# Altium PCB PCB1_SMD.PcbDoc
Units mm, origin at the board's own origin, x right, y up, seen from the top; angles counter-clockwise.
Board outline 82.88 x 49.4 mm, 4 copper layers (Top Layer, Internal Plane 1, Internal Plane 2, Bottom Layer); 45 components, 35 nets, 171 pads, 0 vias.
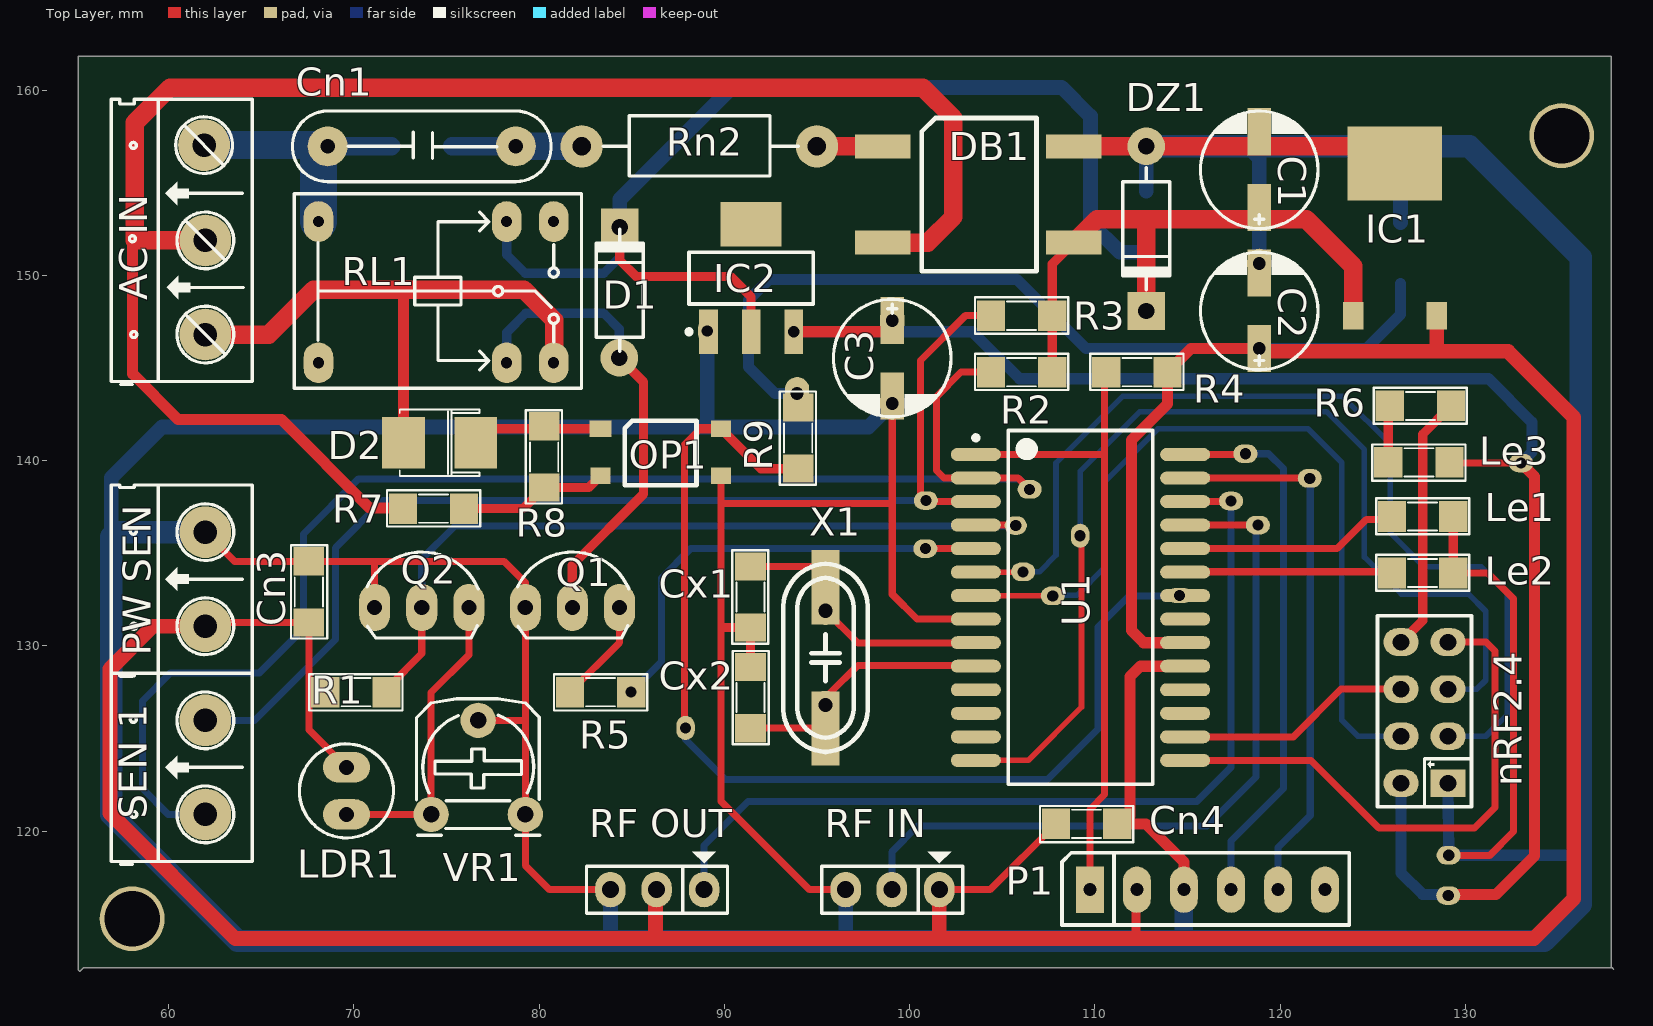
[diagram p0: Top Layer view]
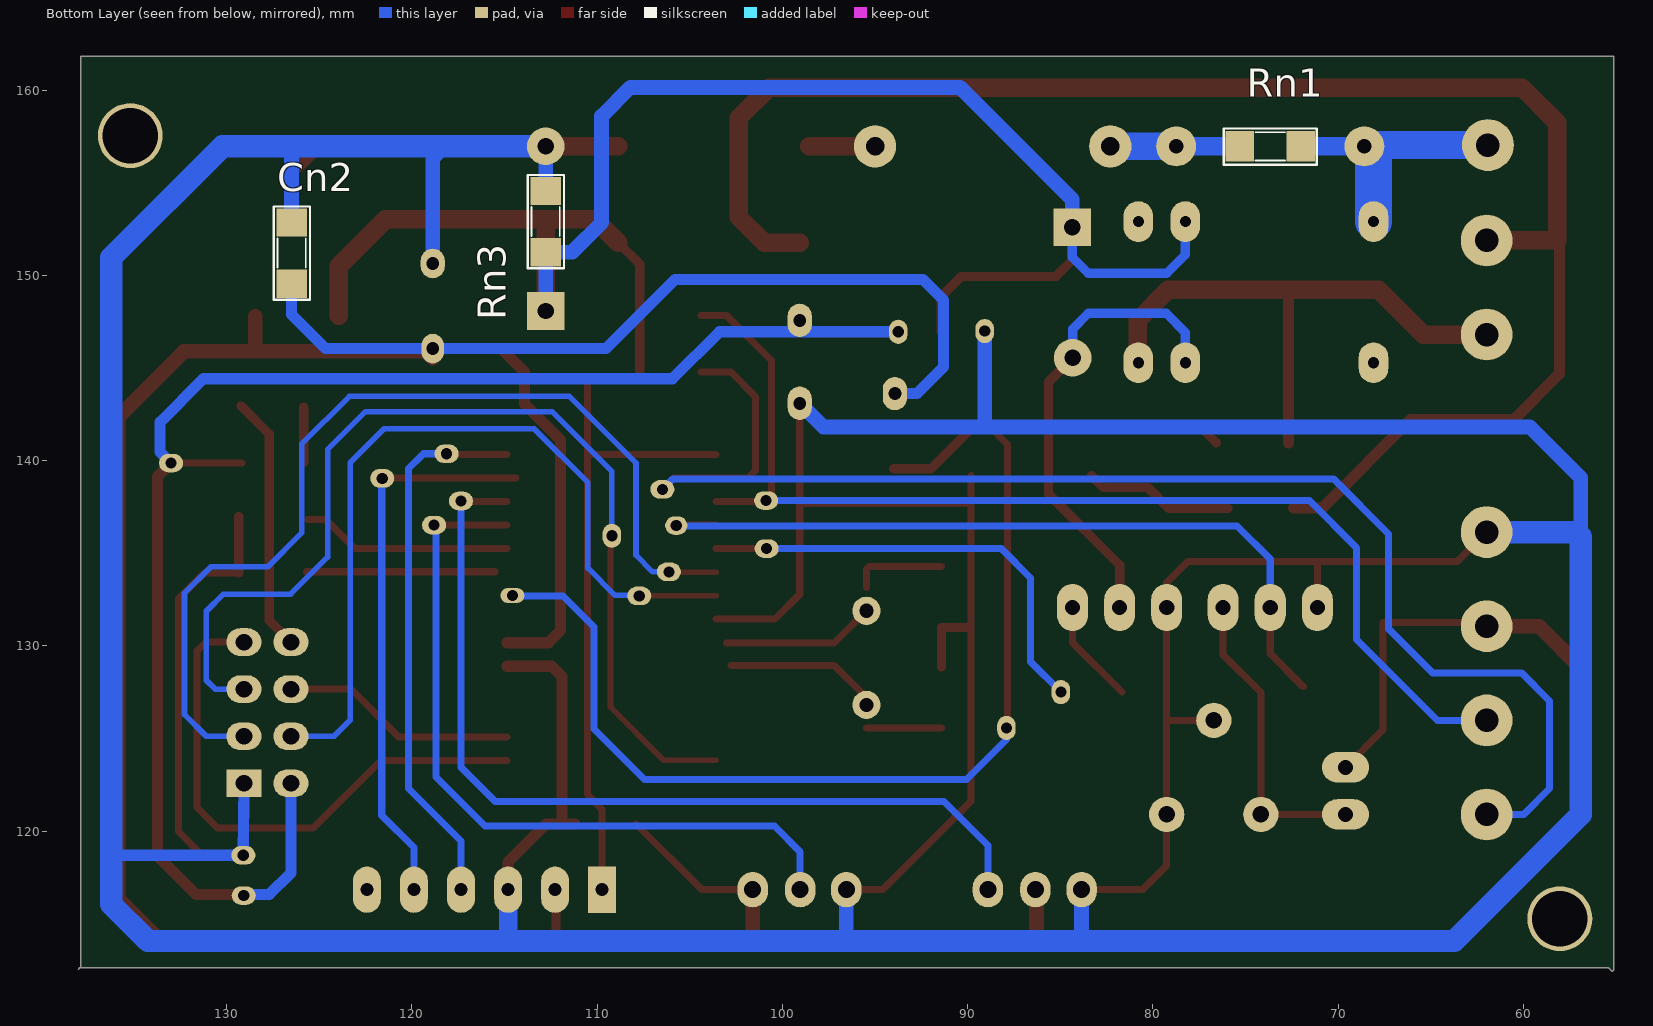
[diagram p1: Bottom Layer view, seen from below]
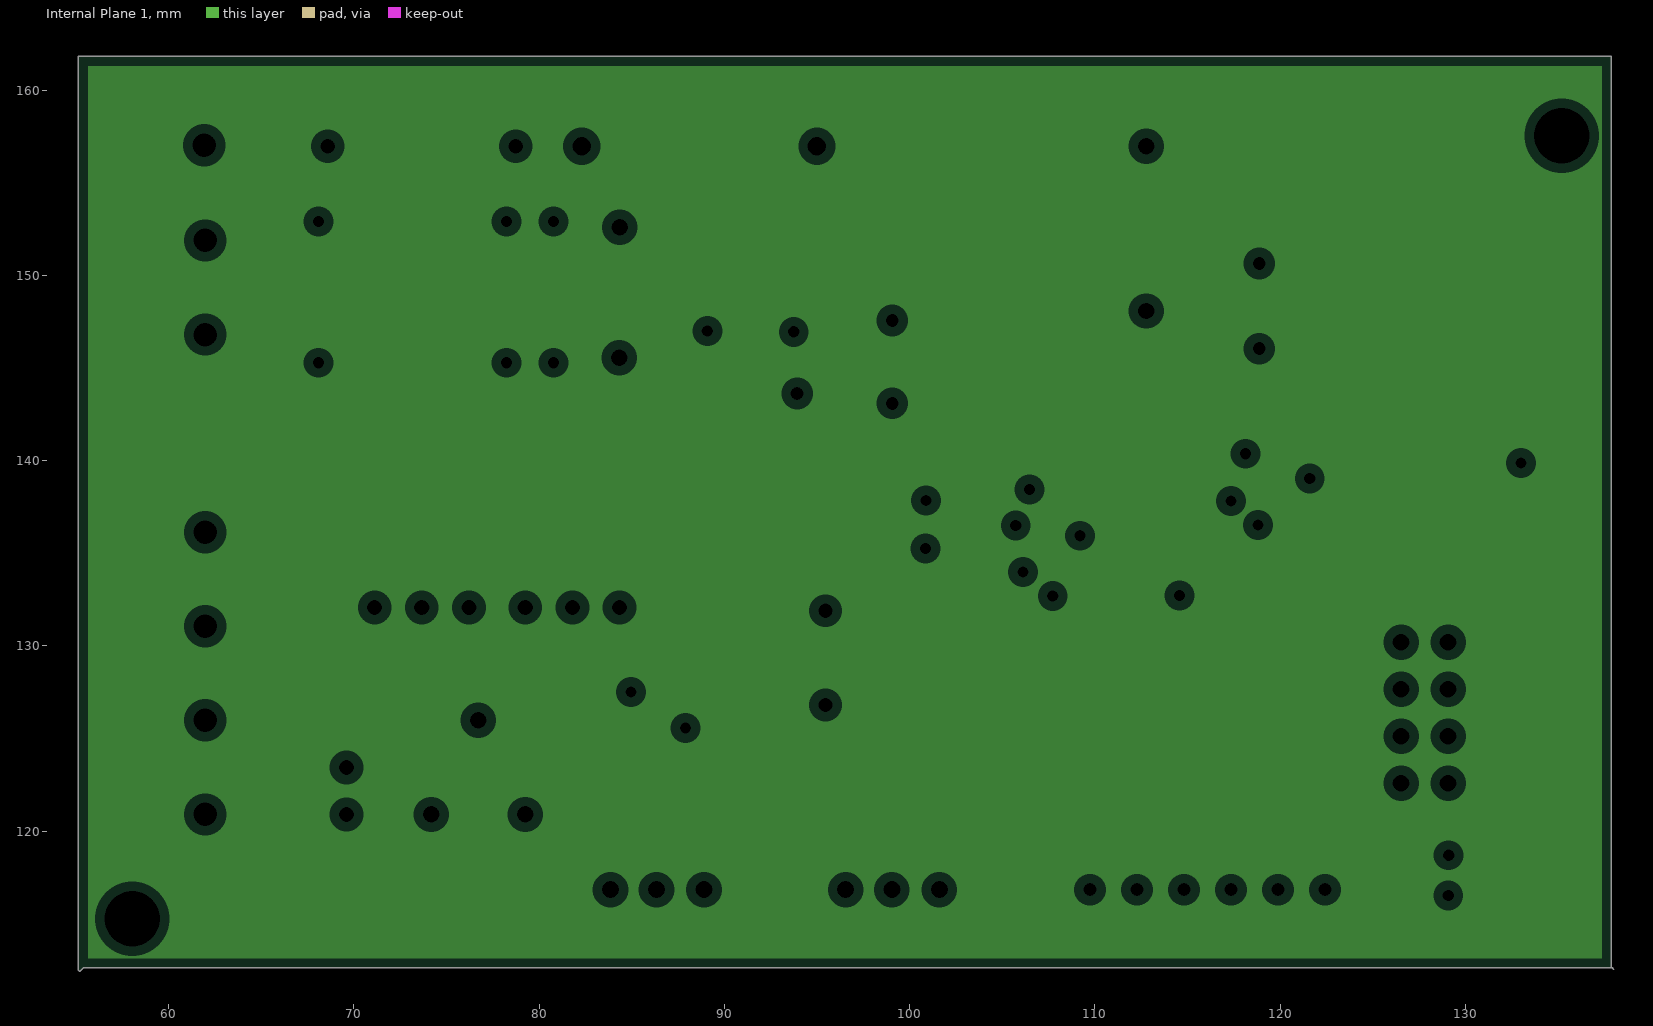
[diagram p2: Internal Plane 1, clearances drawn from the general rule]
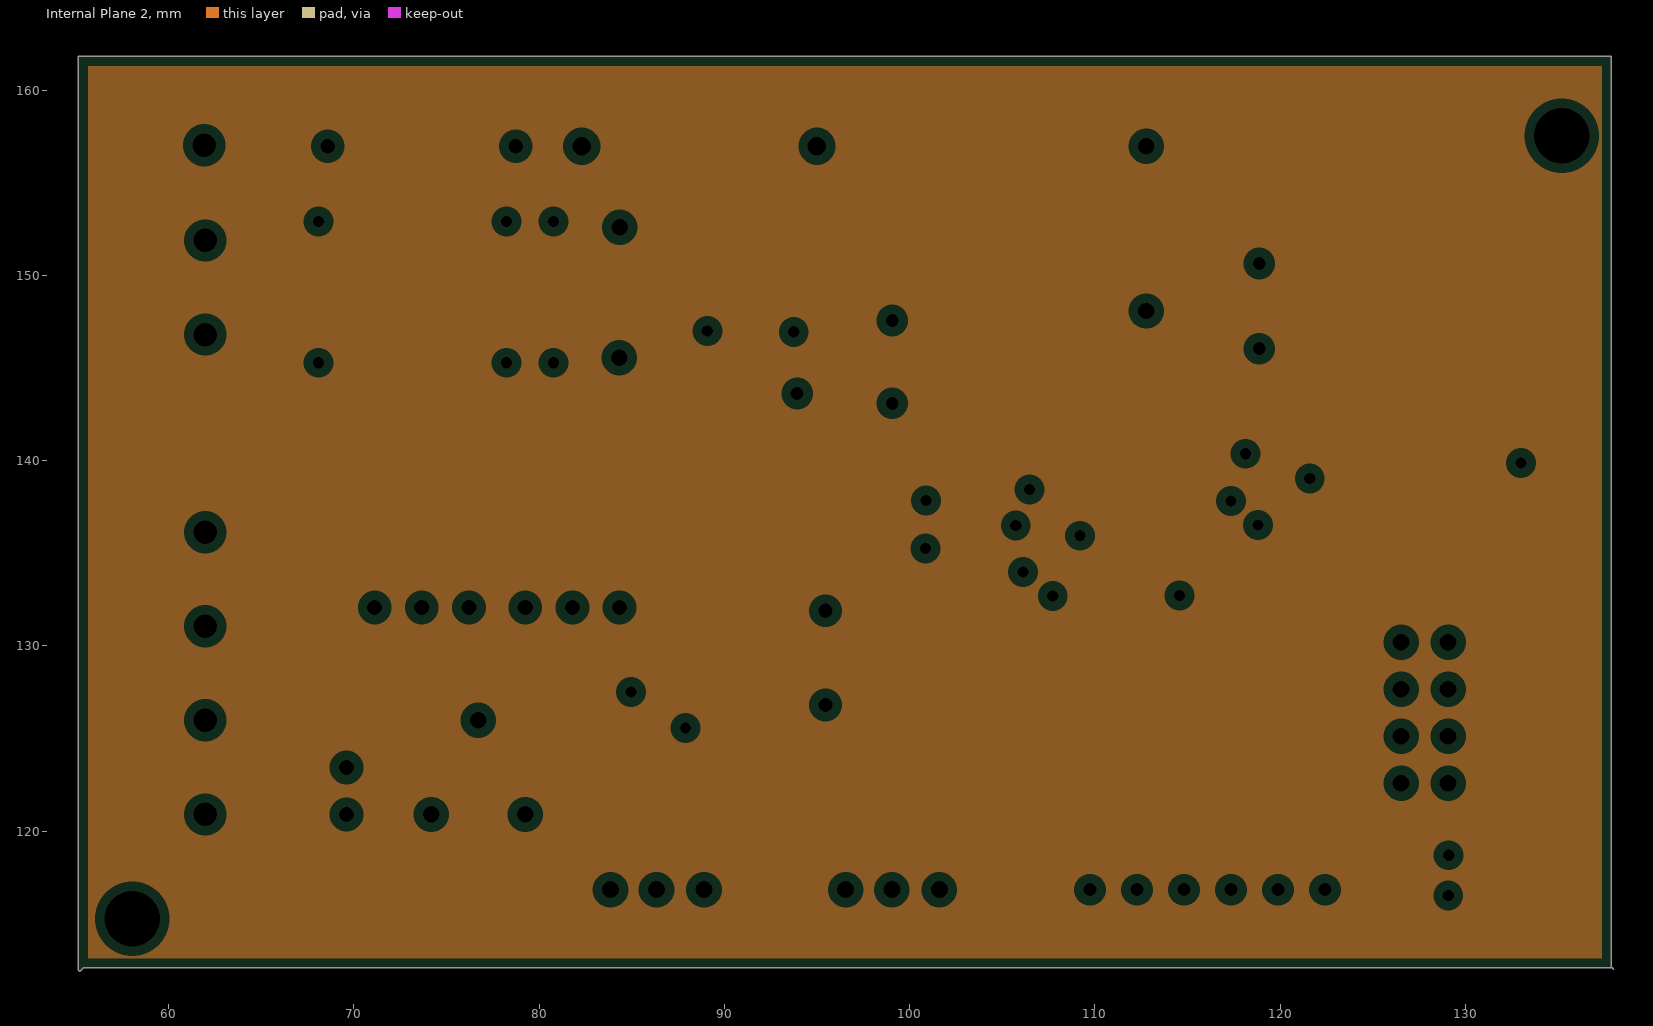
[diagram p3: Internal Plane 2, clearances drawn from the general rule]
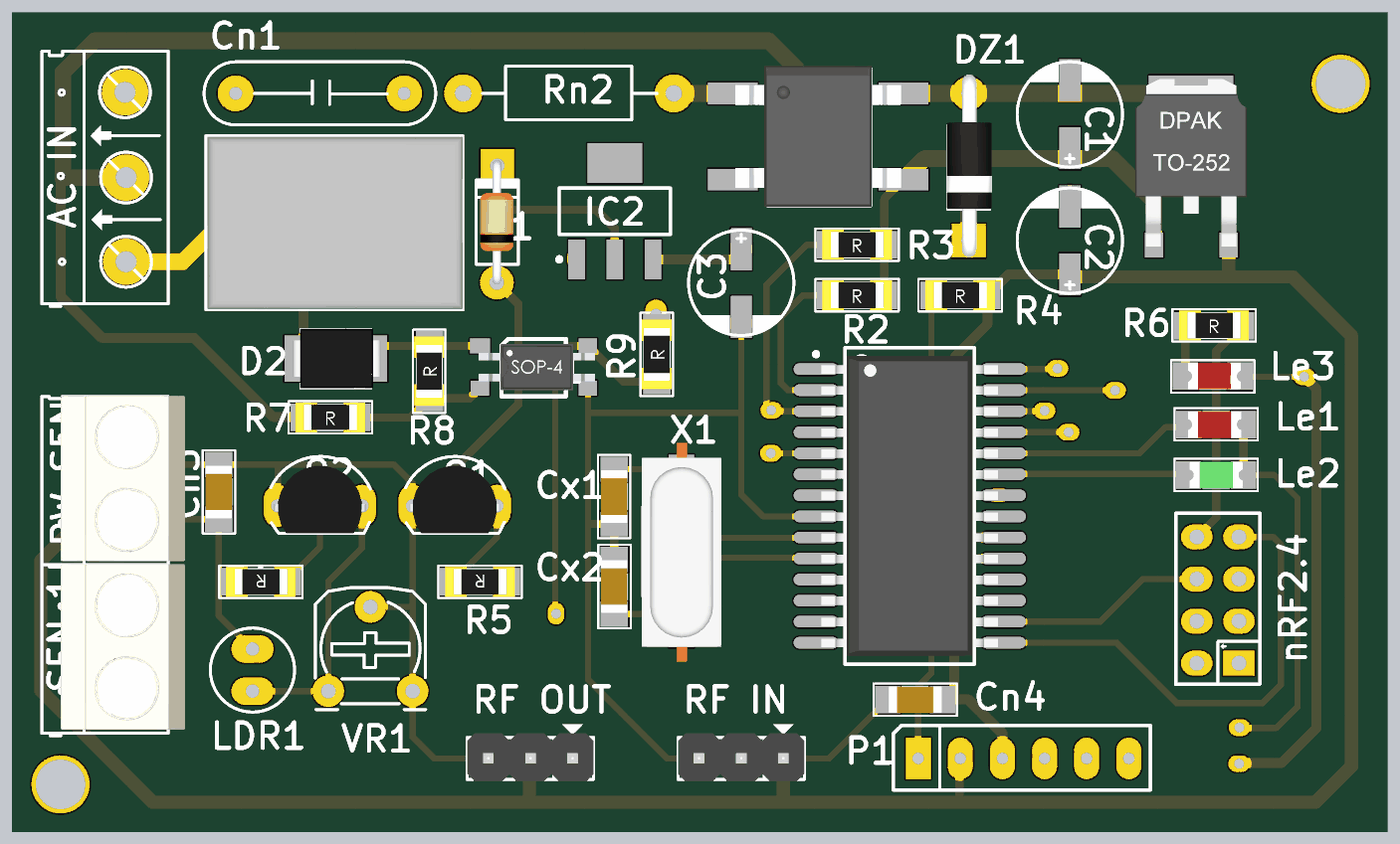
[diagram p4: 3D render of the assembled board from above, using the file's embedded part models]
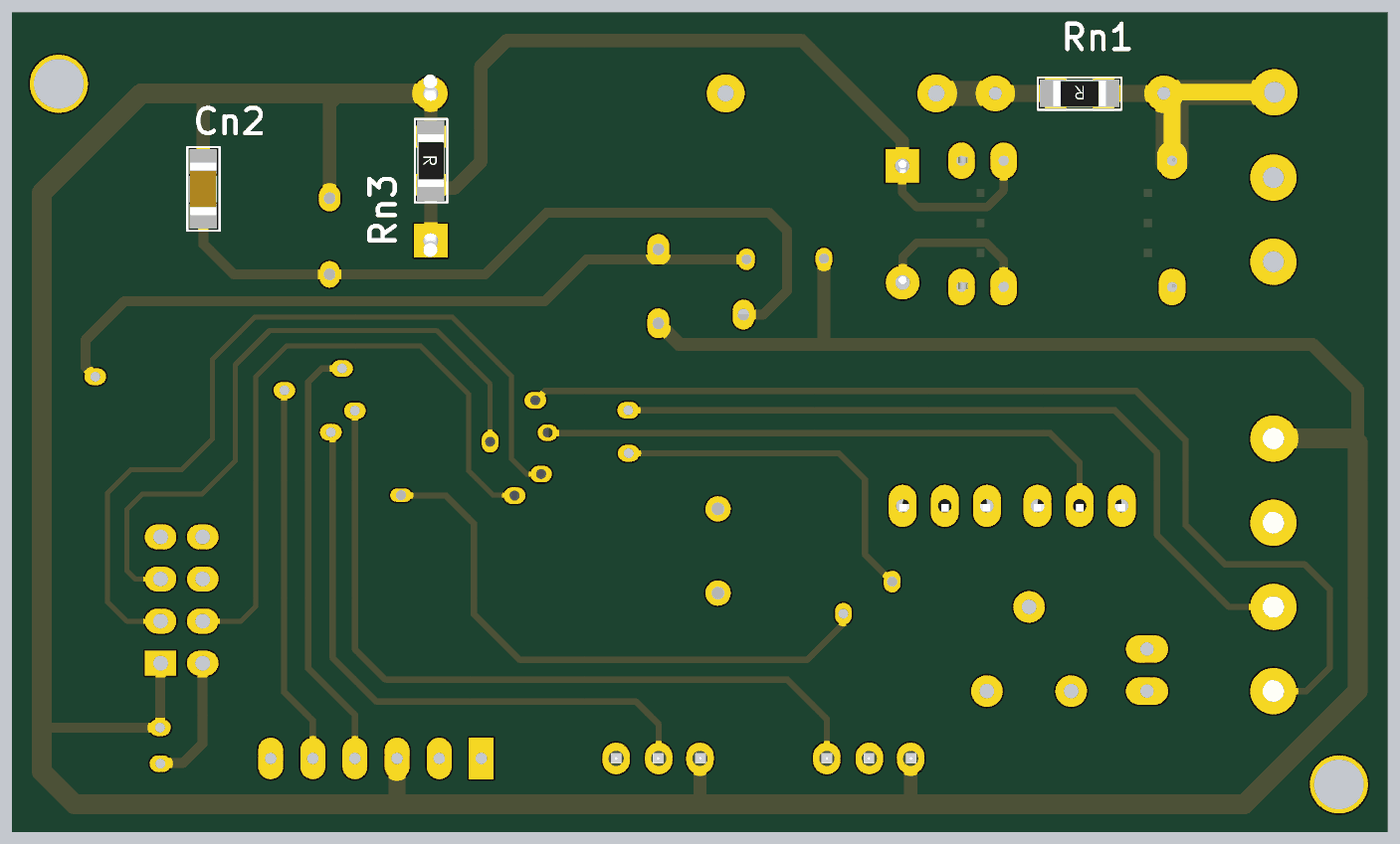
[diagram p5: 3D render of the assembled board from below, using the file's embedded part models]

## Layer stack, top to bottom
Top Layer: signal copper 0.0356
Dielectric: dielectric 0.32, FR-4, Dk 4.8
Internal Plane 1: plane copper 0.0356
Dielectric: dielectric 0.32, FR-4, Dk 4.8
Internal Plane 2: plane copper 0.0356
Dielectric: dielectric 0.32, FR-4, Dk 4.8
Bottom Layer: signal copper 0.0356

## Board outline
55.125,161.825 137.875,161.825 137.875,112.675 138,112.55 137.925,112.625 125.575,112.625 55.4,112.625 55.2,112.425 55.125,112.5 55.125,117.425 55.125,161.825

## Design rules (kind name [scope] priority, off if disabled: settings)
AssemblyTestPointUsage AssemblyTestPointUsage_1 [All] p2:
AssemblyTestpoint AssemblyTestpoint_1 [All] p2: testpointundercomponent=TRUE minsize=1.016 maxsize=2.54 preferedsize=1.524 minholesize=0 maxholesize=1.016 preferedholesize=0.813 testpointgrid=0.025 usegrid=TRUE gridtolerance=0 allowsidetop=TRUE allowsidebottom=TRUE
Clearance [All] p1: gap=0.4
ComponentClearance ComponentClearance_1 [All] p2: gap=0.254 collisioncheckmode=3 verticalgap=0.254 showdistances=FALSE
DiffPairsRouting DiffPairsRouting_1 [All] p2: maxlimit=0.254 minlimit=0.254 mostfreqgap=0.254 maxuncoupledlength=12.7
FabricationTestPointUsage TestPointUsage [All] p2: valid=0 allowmultiple=FALSE
FabricationTestpoint Testpoint [All] p2: side=3 testpointundercomponent=TRUE minsize=1.016 maxsize=2.54 preferedsize=1.524 minholesize=0 maxholesize=1.016 preferedholesize=0.813 testpointgrid=0.025 allowsidetop=TRUE allowsidebottom=TRUE usegrid=TRUE gridtolerance=0
FanoutControl Fanout_LCC [IsLCC] p1: bgadir=Out bgaviamode=Centered fanoutstyle=Auto fanoutdirection=Alternating viagrid=0.025 // Fanout_LCC (Default Rule)
FanoutControl Fanout_BGA [IsBGA] p2: bgadir=Out bgaviamode=Centered fanoutstyle=Auto fanoutdirection=Alternating viagrid=0.025 // Fanout_BGA (Default Rule)
FanoutControl Fanout_Small [(CompPinCount < 5)] p3: bgadir=Out bgaviamode=Centered fanoutstyle=Auto fanoutdirection=OutThenIn viagrid=0.025 // Fanout_Small (Default Rule)
FanoutControl Fanout_SOIC [IsSOIC] p4: bgadir=Out bgaviamode=Centered fanoutstyle=Auto fanoutdirection=Alternating viagrid=0.025 // Fanout_SOIC (Default Rule)
FanoutControl Fanout_BGA_1 [IsBGA] p6: bgadir=Out bgaviamode=Centered fanoutstyle=Auto fanoutdirection=Alternating viagrid=0.025 // Fanout_BGA (Default Rule)
FanoutControl Fanout_LCC_1 [IsLCC] p7: bgadir=Out bgaviamode=Centered fanoutstyle=Auto fanoutdirection=Alternating viagrid=0.025 // Fanout_LCC (Default Rule)
FanoutControl Fanout_SOIC_1 [IsSOIC] p8: bgadir=Out bgaviamode=Centered fanoutstyle=Auto fanoutdirection=Alternating viagrid=0.025 // Fanout_SOIC (Default Rule)
FanoutControl Fanout_Small_1 [(CompPinCount < 5)] p9: bgadir=Out bgaviamode=Centered fanoutstyle=Auto fanoutdirection=OutThenIn viagrid=0.025 // Fanout_Small (Default Rule)
FanoutControl Fanout_Default_1 [All] p10: bgadir=Out bgaviamode=Centered fanoutstyle=Auto fanoutdirection=Alternating viagrid=0.025 // Fanout_Default (Default Rule)
Height Height_1 [All] p2: minheight=0 maxheight=25.4 prefheight=12.7
HoleSize HoleSize_1 [All] p2: absolutevalues=TRUE maxlimit=2.54 minlimit=0.025 maxpercent=80.000 minpercent=20.000
HoleToHoleClearance HoleToHoleClearance_1 [All] p2: gap=0.254 allowstackedmicrovias=TRUE
LayerPairs LayerPairs_1 [All] p2: enforce=TRUE
MinimumSolderMaskSliver MinimumSolderMaskSliver_1 [All] p2: minsoldermaskwidth=0.254
NetAntennae NetAntennae_1 [All] p2: netantennaetolerance=0
PasteMaskExpansion PasteMaskExpansion_1 [All] p2: expansion=0
PlaneClearance [All] p1: clearance=0.508
PlaneClearance PlaneClearance_1 [All] p2: clearance=0.508
PlaneConnect [All] p1: planeconnectstyle=Relief reliefexpansion=0.508 reliefentries=4 reliefconductorwidth=0.254 reliefairgap=0.254
PolygonConnect [All] p1: connectstyle=Relief reliefconductorwidth=0.254 reliefentries=4 polygonreliefangle="90 Angle"
PolygonConnect PolygonConnect_1 [All] p2: connectstyle=Relief reliefconductorwidth=0.254 reliefentries=4 polygonreliefangle="90 Angle"
RoutingPriority RoutingPriority_1 [All] p2: routingpriority=0
RoutingTopology RoutingTopology_1 [All] p2: topology=Shortest
RoutingVias [All] p1: holewidth=0.6 width=1 viastyle="Through Hole" minholewidth=0.711 minwidth=1.27 maxholewidth=0.711 maxwidth=1.27
ShortCircuit ShortCircuit_1 [All] p2: allowed=FALSE
SilkToSilkClearance SilkToSilkClearance_1 [All] p2: silktosilkclearance=0.254
SilkscreenOverComponentPads [All] p1: minsilkscreentomaskgap=0.254
SilkscreenOverComponentPads SilkscreenOverComponentPads_1 [All] p2: minsilkscreentomaskgap=0.254
SolderMaskExpansion [All] p1: expansion=0.102
SolderMaskExpansion SolderMaskExpansion_1 [All] p2: expansion=0.102
UnRoutedNet UnRoutedNet_1 [All] p2:
Width [All] p1: maxlimit=2 minlimit=0.3 preferedwidth=0.38
21 further rules are at their usual default settings.

## Components (designator, comment, footprint, x,y, rotation, side; value= is the part's Value field where it differs from the comment)
"AC IN" "Header 3" HED3 61.976,146.812 r90 top
C1 "100uF/35V" CP1/2.5_SM 118.872,154.432 r90 top
C2 "100uF/35V" CP1/2.5_SM 118.872,146.812 r90 top
C3 "100uF/35V" CP1/2.5_SM 99.06,146.812 r270 top
Cn1 "474" CN4 68.58,156.972 r0 top
Cn2 "104" "SM-CAP 1206" 126.492,152.908 r270 bottom
Cn3 "104" "SM-CAP 1206" 67.564,134.62 r270 top
Cn4 "104" "SM-CAP 1206" 111.252,120.396 r180 top
Cx1 "22pF" "SM-CAP 1206" 91.406,130.942 r90 top
Cx2 "22pF" "SM-CAP 1206" 91.406,128.91 r270 top
D1 "1N4007" 1N4148 84.328,144.78 r90 top
D2 "1N4007" "SM-DIODE 1A" 72.771,140.97 r0 top
DB1 "DB106S" DB106S 98.552,156.972 r270 top
DZ1 "Zener" D1A 112.776,156.972 r90 top
IC1 "78xx" "TO-252 DPAK" 123.952,147.828 r0 top
IC2 "AMS1117" SOT223-4N 91.44,149.86 r90 top
LDR1 "LDR" CDS 69.596,120.904 r90 top
Le1 "LED" "SM-LED RED 1206" 126.094,136.987 r0 top
Le2 "LED" "SM-LED BLUE 1206" 126.094,133.939 r0 top
Le3 "LED" "SM-LED RED 1206" 129.091,139.908 r180 top
nRF2.4 "HED 4X2" "HED 2X4" 129.091,122.636 r90 top
OP1 "TLP521-1" SOP-4 83.312,141.732 r270 top
P1 "Header 6" HED6 109.728,116.84 r0 top
"PW SEN" "Header 2" HED2 61.976,131.064 r90 top
Q1 "C1815" QTO-92 81.788,132.08 r0 top
Q2 "C1815" QTO-92 73.66,132.08 r0 top
R1 "2.2k" SM-1206 70.104,127.508 r180 top
R2 "10k" SM-1206 106.045,144.78 r0 top
R3 "10k" SM-1206 106.045,147.828 r0 top
R4 "10k" SM-1206 112.268,144.78 r0 top
R5 "1k" SM-1206 83.312,127.508 r180 top
R6 "1k" SM-1206 127.567,142.956 r0 top
R7 "1k" SM-1206 74.295,137.414 r0 top
R8 "10k" SM-1206 80.264,140.208 r90 top
R9 "10k" SM-1206 93.98,141.224 r90 top
"RF IN" "Jumper 3" JP3 99.06,116.84 r180 top
"RF OUT" "Jumper 3" JP3 86.36,116.84 r180 top
RL1 "HK4100F" RL_SPDT_3A 78.232,152.908 r180 top
Rn1 "220k" SM-1206 73.66,156.972 r0 bottom
Rn2 "100" R1W 82.296,156.972 r0 top
Rn3 "10k" SM-1206 112.776,152.908 r270 bottom
"SEN 1" "Header 2" HED2 61.976,120.904 r90 top
U1 "PIC16F886" SOP_28M_127 109.22,132.08 r0 top
VR1 "10K" VR 74.168,120.904 r0 top
X1 "12Mhz" Xtal_SMD 95.468,131.879 r90 top

## Footprints (in the part's own frame and the unit in brackets; to place one, negate y for a bottom-side part, rotate by r counter-clockwise, add the part's x,y. Pads: shape width x height; smd on the part's side, far side on the other; paste and mask are expansions set on the pad)
1N4148 [mil] "Diode"
  round 80 hole 35: 1(30.51,0)
  rect 80x80 hole 35: 2(308.07,-0.98)
  silkscreen extent 44,-51 304,49, body extent 27,-39 322,39, height 79
CDS [mil] "QUANG TRO"
  oval 65x100 hole 32: 1(0,0) 2(100,0)
  silkscreen extent -50,-100 150,100
CN4 [mil] "Cap np W 0.4"
  round 85 hole 31: 1(0,0) 2(400,0)
  silkscreen extent -75,-75 475,75
CP1/2.5_SM [mil] "Tu hoa SMD 33 >100 uF,50V, 220uF/16V,25V"
  rect 100x50 smd: 1(-30,0) 2(131,0)
  silkscreen extent -75,-125 175,125
D1A [mil] "Diode 1A, W 100mil, L 350mil"
  round 80 hole 35: 1(0,0)
  rect 80x80 hole 35: 2(-350,0)
  silkscreen extent -305,-50 -45,50, body extent -389,-55 45,53, height 107
DB106S [mm] "SMD 1A DIODE BRIDGE"
  rect 1.3x3 smd: 1(0,0) 2(5.2,0) 3(5.2,10.3) 4(0,10.3)
  silkscreen extent -1.53,2.1 6.75,8.3, body extent -1.65,0.15 6.85,10.15, height 3.63
HED2 [mil] "Header 2, 2 pin, hight 300mil, Pin to Pin 200, Colour Green"
  round 110 hole 50: 1(0,0) 2(200,0)
  silkscreen extent -106,-100 300,200, body extent -92,-140 302,155, height 394
HED3 [mil] "Header 3, 3 pin, hight 300mil, Pin to Pin 200, Colour Green"
  round 110 hole 50: 1(0,0) 2(200,0) 3(402.62,2.62)
  silkscreen extent -106,-100 500,200
HED6 [mm] "HED6"
  rect 1.5x2.5 hole 0.7: 1(0,0)
  oval 1.5x2.5 hole 0.7: 2(2.54,0) 3(5.08,0) 4(7.62,0) 5(10.16,0) 6(12.7,0)
  silkscreen extent -1.5,-1.9 14,2
"HED 2X4" [mm] "JUMP 4X2"
  rect 1.5x1.9 hole 0.9: 1(-0.05,0.025)
  oval 1.5x1.9 hole 0.9: 2(-0.05,2.565) 3(2.49,0.025) 4(2.49,2.565) 5(5.03,0.025) 6(5.03,2.565) 7(7.57,0.025) 8(7.57,2.565)
  silkscreen extent -1.32,-1.24 9,3.84
JP3 [mil] "Jumper 3"
  oval 65x75 hole 36: 1(-100,0) 2(1,0) 3(99,0)
  silkscreen extent -150,-81 150,50, body extent -150,-60 150,55, height 355
QTO-92 [mil] "TO-92"
  oval 66x100 hole 32: 1(-100,0) 2(0,0) 3(100,0)
  silkscreen extent -117,-65 120,118, body extent -109,-66 109,95, height 385
R1W [mil] "R 1W, 2 pin, 500mil"
  round 90 hole 39.37: 1(0,0) 2(500,0)
  silkscreen extent 46,-63 460,65
RL_SPDT_3A [mm] "6 PIN RL"
  oval 1.6x2.2 hole 0.6: 1(-2.55,0) 2(-0.01,0) 3(10.15,0) 4(10.15,7.62) 5(-0.01,7.62) 6(-2.55,7.62)
  silkscreen extent -4.05,-1.5 11.45,9, body extent -4.05,-1.45 11.35,8.95, height 2.5
SM-1206 [mil] "Compoment SMD 120x60mil"
  rect 60x65 smd: 1(-65,0) 2(65,0)
  silkscreen extent -99,-38 99,39, body extent -83,-35 83,36, height 25
"SM-CAP 1206" [mil] "1206"
  rect 60x65 smd: 1(1.93,0) 2(131.93,0)
  silkscreen extent -32,-38 166,39, body extent 4,-31 130,31, height 39
"SM-DIODE 1A" [mm] "M7"
  rect 2.3x2.8 smd: 1(-0.1,0) 2(3.8,0)
  silkscreen extent -0.3,-1.8 4,1.8, body extent -0.75,-1.8 4.55,1.8, height 2.4
"SM-LED BLUE 1206" [mil] "PIN 1206"
  rect 60x65 smd: 1(-2.01,0) 2(127.99,0)
  silkscreen extent -36,-38 162,39, body extent 0,-31 126,31, height 43
"SM-LED RED 1206" [mil] "PIN 1206"
  rect 60x65 smd: 1(-2.01,0) 2(127.99,0)
  silkscreen extent -36,-38 162,39, body extent -4,-31 122,31, height 43
SOP-4 [mm] "PHOTOCOUPLER"
  rect 0.9x1.2 smd: 1(0,0)
  rect 0.9x1.1 smd: 2(2.54,0) 3(2.54,6.5) 4(0,6.5)
  silkscreen extent -0.43,1.3 3.05,5.18, body extent -0.12,-0.08 2.68,6.93, height 2.1
SOP_28M_127 [mm] "SOP, 28-Leads, Body 18.1x8.6mm, Pitch 1.27mm, IPC Low Density"
  oval 2.7x0.7 smd: 1(-5.65,8.255) 2(-5.65,6.985) 3(-5.65,5.715) 4(-5.65,4.445) 5(-5.65,3.175) 6(-5.65,1.905) 7(-5.65,0.635) 8(-5.65,-0.635) 9(-5.65,-1.905) 10(-5.65,-3.175) 11(-5.65,-4.445) 12(-5.65,-5.715) 13(-5.65,-6.985) 14(-5.65,-8.255) 15(5.65,-8.255) 16(5.65,-6.985) 17(5.65,-5.715) 18(5.65,-4.445) 19(5.65,-3.175) 20(5.65,-1.905) 21(5.65,-0.635) 22(5.65,0.635) 23(5.65,1.905) 24(5.65,3.175) 25(5.65,4.445) 26(5.65,5.715) 27(5.65,6.985) 28(5.65,8.255)
  silkscreen extent -5.77,-9.55 3.9,9.55, body extent -5.34,-9.04 5.33,9.04, height 2.64
SOT223-4N [mm] "SOT223, 4-Leads, Body 6.5x3.5mm, Pitch 2.3mm, Lead Span 7mm, IPC Medium Density"
  rect 2.4x1 smd: 1(-2.9,2.3) 2(-2.9,0) 3(-2.9,-2.3)
  rect 2.4x3.3 smd: 4(2.9,0)
  silkscreen extent -3.02,-3.35 1.4,3.47, body extent -1.85,-3.35 1.85,3.35, height 1.7
"TO-252 DPAK" [mm] "DPAK"
  rect 1.1x1.5 smd: 1(0,0) 3(4.5,0)
  rect 5.1x4 smd: 2(2.225,8.225)
  body extent -1.13,-0.1 5.6,10, height 2.37
VR [mil] "Resistor Variable"
  round 75 hole 35: 1(0,0) 2(100,200) 3(200,0)
  silkscreen extent -31,-44 231,246
Xtal_SMD [mm] "Xtal Dan"
  round 1.524 hole 0.762: 1(0.02,0.01) 2(-5.06,0.01)
  rect 4x1.524 smd: 1(1.29,0.01) 2(-6.33,0.01)
  silkscreen extent -7.6,-2.28 2.56,2.3, body extent -9.2,-2.4 4,2.4, height 4.3

## Part data
"AC IN": library part Hed3, "Header 3 (Green)"
C1 C2 C3: library part CP3, "Cap 100uF/35V - 470uF/16V"
Cn1: library part CN4, "Cap np W0.4"
Cn2 Cn3 Cn4: library part CN1, "Cap np  1pF - 472pF"
Cx1 Cx2: library part CN0, "Cremic For Xtal 1pF => 100pF"
D1 D2: library part D1A, "Diode 1A"
DB1: "SMD 1A DIODE BRIDGE"
IC2: "IC nguon"
LDR1: "Quang Tro"
Le1 Le2 Le3: "LED Single colour Green and Red"
nRF2.4: library part HED4X2, "JUMP 4X2"
OP1: "Single Opto"
P1: "Header, 6-Pin"
"PW SEN" "SEN 1": library part Hed2, "Header 2 (Green)"
Q1 Q2: "NPN 600mW, ECB"
R1 R2 R3 R4 R5 R6 R7 R8 R9 Rn1 Rn3: library part R1/4W, "Resistor 1/4W"
"RF IN" "RF OUT": library part JP3
RL1: library part "Relay 3", "HK4100F-12V"
Rn2: library part R1W, "Resistor 1W"
U1: "8-Bit CMOS FLASH Microcontroller, 8K x 14 words FLASH, 368 x 8 Bytes RAM, 4 MHz, 28-Pin PDIP 300mil, 4 to 5.5V VDD Range, Commercial Temperature"
VR1: library part VR1, "Var Resistor"
X1: library part XT2, "Crystal For all Crystal 2pin."

## Free pads (board coordinates)
  oval 1.3x1.8 hole 0.7: 0(99.06,143.1) 1(99.06,147.574) 3(93.925,143.625)
  oval 1.3x1.6 hole 0.7: 0(118.872,150.647)
  oval 1.2x1.6 hole 0.7: 1(118.872,146.05)
  oval 1.3x1 hole 0.6: 2(100.845,135.255) 4(100.875,137.85) 6(106.475,138.45) 7(117.35,137.825) 8(118.8,136.525) 9(118.125,140.375) 10(121.6,139.05) 12(106.125,134) 13(107.725,132.7) 19(129.1,118.7) 21(133,139.875) 22(129.075,116.525)
  oval 1.2x1 hole 0.6: 3(105.725,136.5)
  oval 1x1.3 hole 0.6: 11(109.2,135.95) 14(89.075,147) 15(84.963,127.508) 16(87.9,125.575) 18(93.74,146.96)
  oval 1.3x0.8 hole 0.6: 17(114.575,132.725)
  round 3.5 hole 3: 24(135.2,157.55) 26(58.025,115.275)

## Nets (pads, with @x,y where several pads share a name; then routed paths per layer and width w, separated by ;. In a path a pad name is that pad's centre, name@x,y a point inside that pad or via, vN(x,y) a via of type N, cw(c..) or ccw(c..) an arc to the next point about the centre after c; other vN are vias at no path point)
3.3V: C3.1 IC2.3 Le3.1 nRF2.4.2 pad.1@99.06,147.574 pad.18 pad.21 pad.22 | length 88.6
  Top Layer w0.38: C3.1@98.446,146.96 C3.1 ; Le3.1@129.175,139.875 pad.21
  Top Layer w0.6: IC2.3 C3.1@98.446,146.96 ; pad.22@129.1,116.575 131.65,116.575 133.725,118.65 133.725,139.15 pad.21
  Bottom Layer w0.6: pad.18 103.39,146.96 105.925,144.425 131.25,144.425 133.6,142.075 133.6,140.475 pad.21 ; nRF2.4.2 126.526,117.749 127.7,116.575 pad.22@129.1,116.575
12VDC: C1.1 D1.2 DB1.3 DZ1.2 IC1.1 IC2.2 R2.2 R3.2 RL1.2 Rn3.2 | length 96.3
  Top Layer w0.5: D1.2 84.353,150.822 85.225,149.95 90.325,149.95 91.44,148.835 IC2.2 ; R2.2 R3.2 107.696,150.616 DB1.3
  Top Layer w1: DB1.3 110.115,153.035 121.412,153.035 123.952,150.495 IC1.1 ; DZ1.2 112.776,153.03
  Bottom Layer w0.5: RL1.2 78.242,151.118 79.246,150.114 83.489,150.114 84.353,150.978 D1.2
  Bottom Layer w0.8: D1.2 84.353,154.103 90.405,160.155 108.205,160.155 109.755,158.605 109.755,152.855 111.353,151.257 Rn3.2 DZ1.2
CE: nRF2.4.3 pad.12 U1.6 | length 53
  Top Layer w0.3: U1.6 pad.12@106.16,133.985
  Bottom Layer w0.3: pad.12 107,134 107.9,134.9 107.9,139.875 111.5,143.475 123.375,143.475 125.95,140.9 125.95,136.1 127.775,134.275 130.85,134.275 132.275,132.85 132.275,126.3 131.101,125.126 nRF2.4.3
CSN: nRF2.4.4 pad.13 U1.7 | length 44.2
  Top Layer w0.3: U1.7 107.71,132.715 pad.13
  Bottom Layer w0.3: pad.13@107.975,132.725 109.025,132.725 110.5,134.2 110.5,138.825 113.4,141.725 121.5,141.725 123.325,139.9 123.325,126 124.199,125.126 nRF2.4.4
GND: "PW SEN.2" "RF IN.3" "RF OUT.3" C1.2 C2.2 C3.2 Cn2.1 Cn3.1 Cn4.1 Cx1.1 Cx2.1 DB1.4 DZ1.1 IC1.2 IC2.1 Le1.2 Le2.2 nRF2.4.1 OP1.3 P1.3 pad.0 pad.14 pad.19 Q1.1 Q2.1 Rn3.1 U1.8 U1.19 VR1.2 VR1.3 | length 405.9
  Top Layer w0.38: 61.976,136.144 63.549,134.571 Cn3.1 78.104,134.571 79.248,133.427 Q1.1 VR1.3 79.248,118.152 80.56,116.84 83.845,116.84 ; Q2.1 71.12,134.551 ; VR1.2 79.057,125.984 ; OP1.3@89.825,139.192 89.825,137.7 ; 96.545,116.84 94.585,116.84 89.825,121.6 89.825,137.7 ; C3.2 99.06,137.7 ; U1.8 100.405,131.445 99.06,132.79 99.06,137.7 ; pad.19@129.275,118.675 131.3,118.675 132.6,119.975 132.6,132.55 131.211,133.939 Le2.2 ; 89.825,137.7 99.06,137.7
  Top Layer w0.5: 89.891,130.991 Cx1.1 Cx2.1 ; Le2.2 Le1.2
  Top Layer w0.6: Cn4.1 112.754,120.396 114.808,118.342 P1.3 ; Cn4.1@111.9,120.825 111.9,128.35 112.455,128.905 U1.19
  Top Layer w1: DB1.4 DZ1.1 125.258,156.972 IC1.2
  Bottom Layer w0.38: 136.075,118.7 136.225,118.85
  Bottom Layer w0.6: 97.785,141.825 pad.0@99.06,143.1 ; nRF2.4.1 pad.19 136.075,118.7
  Bottom Layer w0.8: 56.896,135.9 56.896,139.071 59.65,141.825 97.785,141.825 pad.0@99.06,143.1 ; 83.845,113.945 83.845,114.075 83.845,116.84 ; 89.075,142.125 pad.14 ; 96.545,114.075 96.545,116.84 ; Rn3.1 DZ1.1 ; 118.237,156.972 118.872,156.337 pad.0@118.872,150.647 ; Cn2.1 126.492,156.845
  Bottom Layer w1: 114.808,114.275 P1.3
  Bottom Layer w1.2: 56.896,135.9 56.896,120.904 63.725,114.075 83.845,114.075 96.545,114.075 134.25,114.075 136.225,116.05 136.225,118.85 136.225,150.975 130.228,156.972 118.237,156.972 DZ1.1 ; 57.14,136.144 61.976,136.144
ICSPCLK: P1.5 pad.10 U1.27 | length 29.9
  Top Layer w0.38: U1.27@114.37,139.065 pad.10@121.325,139.065
  Bottom Layer w0.38: P1.5 119.888,119.113 121.625,120.85 121.625,138.825 pad.10
ICSPDAT: P1.4 pad.9 U1.28 | length 29.5
  Top Layer w0.38: U1.28 pad.9@118.11,140.335
  Bottom Layer w0.38: P1.4 117.348,119.473 120.175,122.3 120.175,139.575 119.375,140.375 pad.9
LDR: pad.3@105.725,136.5 Q2.2 R1.1 U1.4 | length 42.6
  Top Layer w0.38: R1.1@71.875,127.8 73.66,129.585 Q2.2 ; U1.4 pad.3@105.7,136.525
  Bottom Layer w0.38: Q2.2 73.66,134.685 75.45,136.475 pad.3@105.725,136.475
LED1: Le1.1 U1.24 | length 11.4
  Top Layer w0.38: U1.24 123.08,135.255 124.65,136.825 Le1.1@125.625,136.825
LED2: Le2.1 U1.23 | length 10.2
  Top Layer w0.38: U1.23@115.5,134.005 Le2.1@125.7,134.005
MCLR: P1.1 R4.1 U1.1 | length 34.8
  Top Layer w0.38: U1.1 110.525,140.335 ; P1.1 109.728,121.178 110.525,121.975 R4.1@110.525,144.325
"NetAC IN_1": "AC IN.1" D2.1 RL1.6 | length 31
  Top Layer w0.6: D2.1 72.671,148.944
  Top Layer w1: 61.976,146.812 65.405,146.812 67.818,149.225 79.175,149.225 80.825,147.575 80.825,145.2 RL1.6@80.775,145.15
"NetAC IN_2": "AC IN.2" DB1.2 R7.1 | length 91.3
  Top Layer w0.6: 58.039,153.543 58.039,144.696 60.51,142.225 66.075,142.225 70.845,137.455 R7.1@72.405,137.455
  Top Layer w1: 61.976,151.892 58.166,151.892 58.166,158.242 60.071,160.147 100.711,160.147 102.362,158.496 102.362,153.162 100.965,151.765 DB1.2@99.06,151.765
"NetAC IN_3": "AC IN.3" Cn1.1 RL1.3 Rn1.1 | length 14.3
  Bottom Layer w1: Cn1.1@68.082,156.474 Cn1.1 Rn1.1
  Bottom Layer w1.5: 61.909,157.039 Cn1.1@68.513,157.039
  Bottom Layer w2: RL1.3 Cn1.1@68.082,156.474
NetCn1_2: Cn1.2 Rn1.2 Rn2.1 | length 7
  Bottom Layer w1: Rn1.2 Cn1.2
  Bottom Layer w1.5: Cn1.2 Rn2.1
NetCx1_2: Cx1.2 U1.9 X1.1 | length 13.4
  Top Layer w0.38: Cx1.2 95.317,134.293 95.458,134.152 X1.1@95.458,133.169 ; X1.1@95.458,131.899 97.207,130.15 U1.9@103.025,130.15
NetCx2_2: Cx2.2 U1.10 X1.2 | length 12.4
  Top Layer w0.38: Cx2.2 X1.2@95.458,125.559 ; X1.2@95.68,126.83 95.68,127.43 97.2,128.95 U1.10@102.775,128.95
NetD1_1: D1.1 Q1.2 RL1.5 | length 25.7
  Top Layer w0.5: Q1.2 81.788,134.363 85.63,138.205 85.63,144.253 D1.1
  Bottom Layer w0.5: RL1.5 78.242,146.917 79.28,147.955 83.48,147.955 84.328,147.107 D1.1
NetD2_2: D2.2 OP1.1 R8.2 | length 7.1
  Top Layer w0.5: D2.2 77.333,141.732 OP1.1
NetDB1_1: DB1.1 Rn2.2 | length 3.6
  Top Layer w1: Rn2.2 DB1.1
NetLDR1_1: LDR1.1 Q2.3 VR1.1 | length 16.6
  Top Layer w0.38: LDR1.1 VR1.1 74.168,127.493 76.2,129.525 Q2.3
NetLe3_2: Le3.2 R6.1 | length 3
  Top Layer w0.5: Le3.2 R6.1@125.84,142.88
NetOP1_2: OP1.2 R7.2 R8.1 | length 8.1
  Top Layer w0.5: R7.2 79.121,137.414 R8.1 82.677,138.557 OP1.2
NetQ1_3: Q1.3 R5.2 | length 5.7
  Top Layer w0.38: R5.2 84.328,130.175 Q1.3
"PW ON": OP1.4 pad.16 pad.17 R9.1 U1.22 | length 58
  Top Layer w0.38: pad.16@87.85,125.6 87.85,140.875 88.707,141.732
  Top Layer w0.5: 88.707,141.732 OP1.4 91.971,139.573 R9.1
  Bottom Layer w0.38: pad.16 87.9,124.95 90.05,122.8 107.45,122.8 110.175,125.525 110.175,131.025 111.85,132.7 pad.17@114.45,132.7
RFIN: "RF IN.2" pad.8 U1.25 | length 40.9
  Top Layer w0.38: U1.25 pad.8@118.75,136.525
  Bottom Layer w0.38: 99.035,116.84 99.035,118.885 100.425,120.275 116.05,120.275 118.7,122.925 pad.8@118.7,136.525
RFOUT: "RF OUT.1" pad.7 U1.26 | length 49.4
  Top Layer w0.38: U1.26 pad.7@117.27,137.795
  Bottom Layer w0.38: 88.9,116.84 88.9,119.225 91.275,121.6 115.5,121.6 117.35,123.45 pad.7
RL: pad.2 pad.15 R5.1 U1.5 | length 24.5
  Top Layer w0.38: pad.2 U1.5
  Bottom Layer w0.38: pad.15 86.6,129.145 86.6,133.675 88.18,135.255 pad.2
SCK: nRF2.4.5 pad.11 U1.14 | length 58
  Top Layer w0.3: U1.14@104.85,123.825 U1.14 106.4,123.825 109.275,126.7 pad.11@109.275,135.475
  Bottom Layer w0.3: pad.11 109.2,139.425 112.425,142.65 122.5,142.65 124.55,140.6 124.55,134.8 126.55,132.8 130.175,132.8 131.1,131.875 131.1,128.15 130.616,127.666 nRF2.4.5 nRF2.4.5@129.566,127.666
SDI: nRF2.4.7 U1.15 | length 29.9
  Top Layer w0.38: U1.15 121.675,123.825 125.325,120.175 130.5,120.175 131.6,121.275 131.6,129.725 131.119,130.206 nRF2.4.7
SDO: nRF2.4.6 U1.16 | length 12.7
  Top Layer w0.38: U1.16 120.72,125.095 123.291,127.666 nRF2.4.6
SEN1: "SEN 1.1" pad.6 R2.1 U1.2 | length 77.7
  Top Layer w0.38: R2.1 102.78,144.78 101.45,143.45 101.45,139.475 101.86,139.065 U1.2 105.86,139.065 pad.6
  Bottom Layer w0.38: 61.976,120.904 59.971,120.904 58.575,122.3 58.575,127.025 60.1,128.55 64.9,128.55 67.275,130.925 67.275,136.05 70.25,139.025 105.9,139.025 pad.6
SEN2: "SEN 1.2" pad.4 R3.1 U1.3 | length 62.1
  Top Layer w0.38: U1.3 100.575,137.795 100.575,145.4 103.003,147.828 R3.1
  Bottom Layer w0.38: 61.976,125.984 64.634,125.984 69,130.35 69,135.3 71.55,137.85 pad.4
SQR: nRF2.4.8 R6.2 | length 13.9
  Top Layer w0.5: nRF2.4.8 127.694,131.374 127.694,141.432 R6.2
VCC: "PW SEN.1" "RF IN.1" "RF OUT.2" C2.1 Cn2.2 Cn3.2 Cn4.2 IC1.3 LDR1.2 P1.2 pad.1@118.872,146.05 pad.3@93.925,143.625 R1.2 R4.2 R9.2 U1.20 | length 242.1
  Top Layer w0.38: 62.181,131.269 Cn3.2 67.564,125.476 LDR1.2 ; 101.6,116.84 104.345,116.84 Cn4.2
  Top Layer w0.5: 112.219,114.075 P1.2@112.219,116.84
  Top Layer w0.6: U1.20 112.625,130.175 111.975,130.825 111.975,141.125 113.919,143.069 R4.2 115.189,146.05 C2.1
  Top Layer w0.8: 61.976,131.064 59.139,131.064 56.83,128.755 56.83,120.97 63.6,114.2 133.7,114.2 135.85,116.35 135.85,142.35 132.295,145.905 128.452,145.905 ; 86.285,114.5 86.285,117.14 ; 101.6,114.2 101.6,116.84 ; C2.1@118.872,145.542 119.235,145.905 128.452,145.905 ; IC1.3@128.452,147.783 128.452,145.905
  Bottom Layer w0.6: 93.2,143.625 92.725,143.625 91.3,145.05 91.3,148.675 92.4,149.775 105.785,149.775 109.51,146.05 118.872,146.05 124.65,146.05 126.492,147.892 Cn2.2
pads on no net: IC2.4 P1.6 RL1.1 RL1.4 U1.11 U1.12 U1.13 U1.17 U1.18 U1.21

## Polygon pours and split planes (outlines as drawn)
no net on Internal Plane 1 (split plane): 137.365,113.135 55.635,113.135 55.635,117.425 55.635,161.315 137.365,161.315
no net on Internal Plane 2 (split plane): 137.365,113.135 55.635,113.135 55.635,117.425 55.635,161.315 137.365,161.315

## Silkscreen, mask and mechanical layers (free items; w line width, h text height)
Top Solder:
  lines w1: 61.976,146.812 65.412,146.812 67.825,149.225 79.175,149.225 80.825,147.575 80.825,145.2
Bottom Solder:
  lines w1: 61.909,157.039 68.186,157.039 68.082,156.934 68.082,152.908
Mechanical 1:
  lines w0.254: 55.125,112.55 55.125,161.75 137.925,161.75 137.925,112.55 55.125,112.55
Mechanical 16:
  drawing of 1874 lines, arcs and shapes, not listed
  text "1" at 41.326,194.691 h1.78
  text "2" at 113.97,194.691 h1.78
  text "3" at 187.122,194.691 h1.78
  text "4" at 260.02,194.691 h1.78
  text "A" at 6.985,171.679 h1.78
  text "A" at 294.005,171.679 h1.78
  text "B" at 6.985,123.622 h1.78
  text "B" at 294.005,123.622 h1.78
  text "C" at 6.985,75.108 h1.78
  text "C" at 294.005,75.108 h1.78
  text "ENGINEER:" at 179.07,38.1 h1.14
  text "TITLE:" at 217.17,38.1 h1.14
  text "PCB DESIGNER:" at 179.07,30.607 h1.14
  text "D" at 6.985,27.102 h1.78
  text "D" at 294.005,27.102 h1.78
  text "DATE:" at 179.07,22.86 h1.14
  text "PART NO.:" at 217.17,22.86 h1.14
  text "REV:" at 270.51,22.86 h1.14
  text "Altium Limited" at 146.05,20.32 h1.78
  text ".PRINT_DATE" at 180.34,19.812 h1.78
  text "12a Rodborough Rd" at 146.05,17.78 h1.78
  text "Frenchs Forest" at 146.05,15.24 h1.78
  text "FILE NAME:" at 179.07,15.24 h1.14
  text "DWG NO:" at 217.17,15.24 h1.14
  text "SCALE:" at 270.51,15.24 h1.14
  text "NSW 2086" at 146.05,12.7 h1.78
  text ".PCB_FILE_NAME_NO_PATH" at 180.34,12.192 h1.78
  text "1" at 41.326,6.731 h1.78
  text "2" at 113.97,6.731 h1.78
  text "3" at 187.122,6.731 h1.78
  text "4" at 260.02,6.731 h1.78